# Altium PCB PowerDist.PcbDoc (part 1 of 2)
Units mm, origin at the board's own origin, x right, y up, seen from the top; angles counter-clockwise.
Board outline 126.62 x 74.17 mm, 2 copper layers (Top Layer, Bottom Layer); 124 components, 104 nets, 423 pads, 40 vias.
Unrouted connection lines stored in the file: 201.
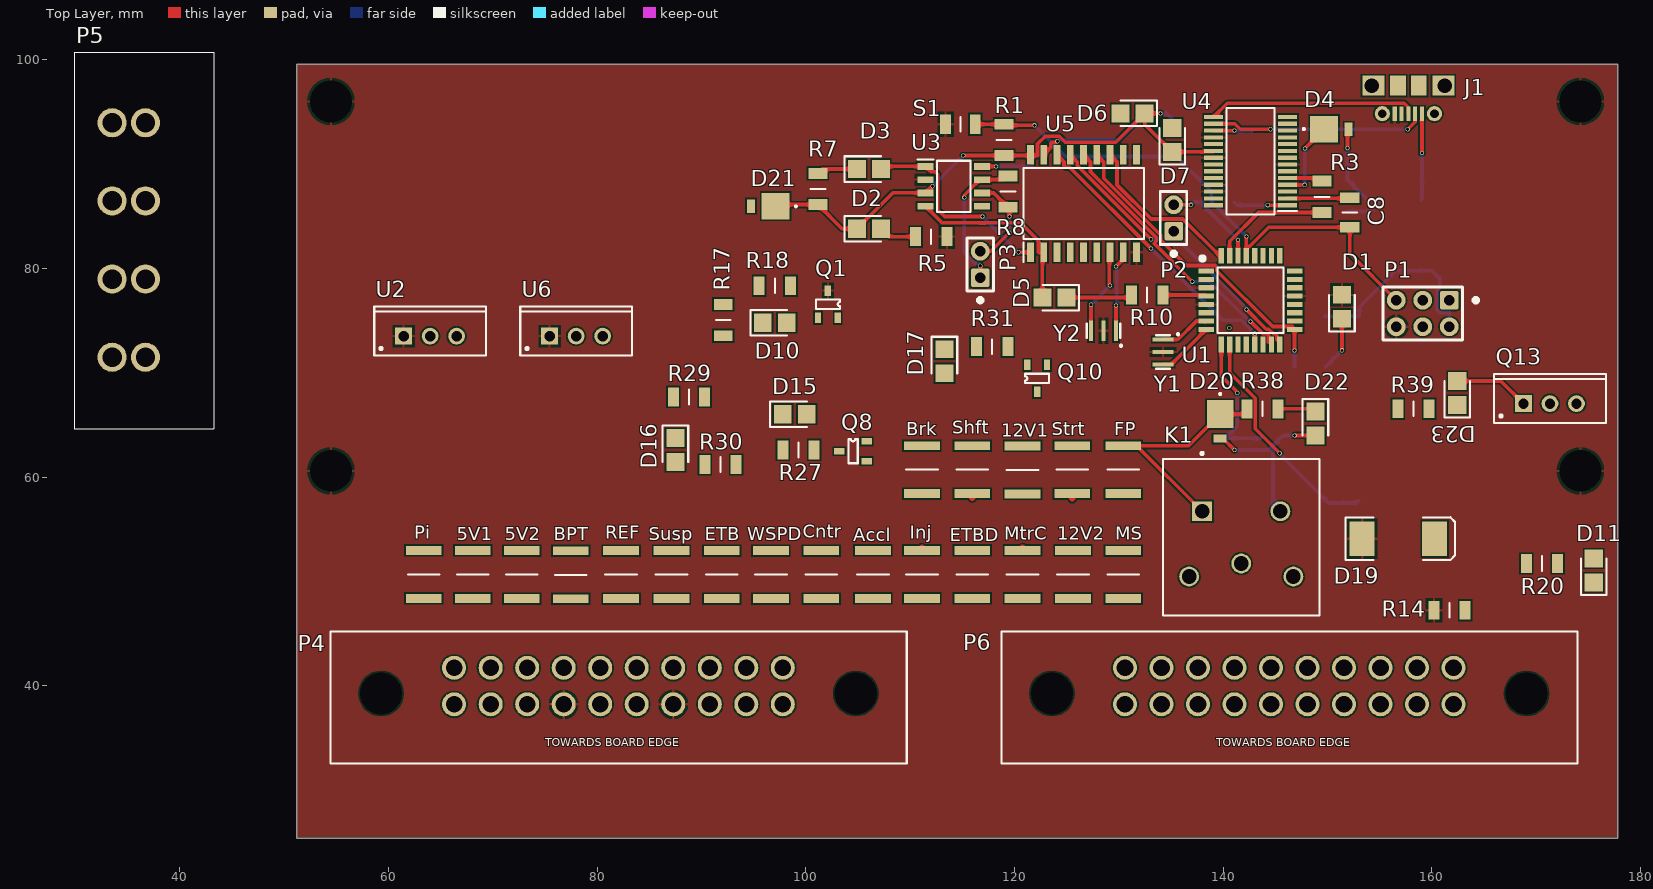
[diagram p0: Top Layer view]
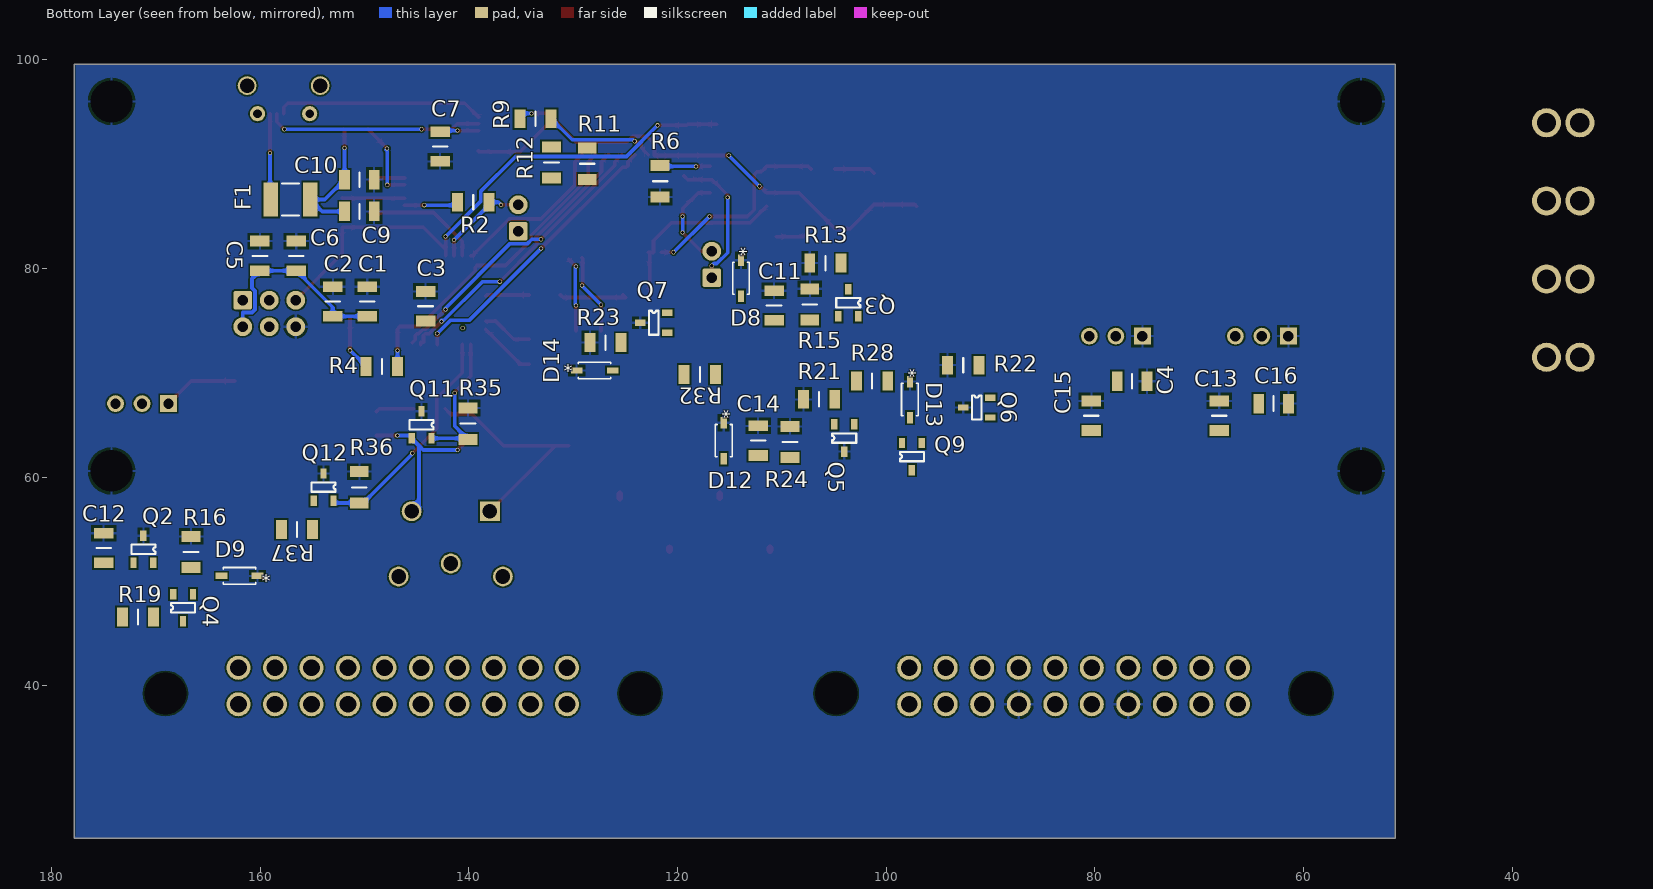
[diagram p1: Bottom Layer view, seen from below]

## Layer stack, top to bottom
Top Solder: solder mask 0.0102, Solder Resist, Dk 3.5
Top Layer: signal copper 0.0356
Dielectric 1: dielectric 0.32, FR-4, Dk 4.8
Bottom Layer: signal copper 0.0356
Bottom Solder: solder mask 0.0102, Solder Resist, Dk 3.5

## Board outline
51.181,99.568 51.181,25.4 177.8,25.4 177.8,99.568

## Design rules (kind name [scope] priority, off if disabled: settings)
Clearance [All] p1: gap=0.1 ignorepadtopadclearanceinfootprint=FALSE except(0.15: Arc-Poly Track-Poly SMDPad-Poly THPad-Poly Via-Poly Fill-Poly Poly-Poly)
PolygonConnect [All] p1: connectstyle=Relief reliefconductorwidth=0.254 reliefentries=4 polygonreliefangle="90 Angle" airgapwidth=0.254
RoutingVias [All] p1: holewidth=0.3 width=0.4 viastyle="Through Hole" minholewidth=0.3 minwidth=0.4 maxholewidth=0.3 maxwidth=0.4
SolderMaskExpansion [All] p1: expansion=0.102
Width [All] p1: maxlimit=6.5 minlimit=0.35 preferedwidth=0.35 minimp=50.000000 maximp=50.000000 favimp=50.000000
30 further rules are at their usual default settings.

## Classes and differential pairs
component class Candunio: C1 C2 C3 C5 C6 C7 C8 C9 C10 D1 D2 D3 D4 D5 D6 D7 D21 F1 J1 P1 P2 P3 R1 R2 R3 R4 R5 R6 R7 R8 R9 R10 R11 R12 S1 U1 U3 U4 U5 Y1 Y2
component class Fusing: 5VSpr1 5VSpr2 12VSpr1 12VSpr2 ACCL BPT BRKLTVIN C4 C13 C15 C16 Cntrllr ETB ETBDrv Fp Inj "MABX REF" MS "Mtr Cntrl" P4 P5 P6 Pi Shft Strt Susp U2 U6 WSPD
component class HighCurrentSwitches: D19 D20 D22 D23 K1 Q11 Q12 Q13 R35 R36 R37 R38 R39
component class LowCurrentSwitches: C11 C12 C14 D8 D9 D10 D11 D12 D13 D14 D15 D16 D17 Q1 Q2 Q3 Q4 Q5 Q6 Q7 Q8 Q9 Q10 R13 R14 R15 R16 R17 R18 R19 R20 R21 R22 R23 R24 R27 R28 R29 R30 R31 R32

## Components (designator, comment, footprint, x,y, rotation, side; value= is the part's Value field where it differs from the comment)
5V1 "1A" FUSC4632X85N 68.072,50.687 r270 top (schematic designator 5VSpr1)
5V2 "1A" FUSC4632X85N 72.771,50.659 r90 top (schematic designator 5VSpr2)
12V1 "1A" FUSC4632X85N 120.777,60.692 r270 top (schematic designator 12VSpr1)
12V2 "1A" FUSC4632X85N 125.603,50.687 r90 top (schematic designator 12VSpr2)
Accl "500mA" FUSC4632X85N 106.426,50.687 r270 top (schematic designator ACCL)
BPT "500mA" FUSC4632X85N 77.47,50.645 r270 top
Brk "1A" FUSC4632X85N 111.125,60.72 r270 top (schematic designator BRKLTVIN)
C1 "4.7uF" CAPC3216X170N 149.733,76.835 r90 bottom
C2 "1uF" CAPC3216X170N 153.035,76.835 r270 bottom
C3 "100nF" CAPC3216X170N 144.145,76.382 r270 bottom
C4 "Cap2" CAPC3216X170N 76.42,69.19 r180 bottom value=10uF
C5 "4.7uF" CAPC3216X170N 160.02,81.212 r270 bottom
C6 "100nF" CAPC3216X170N 156.545,81.212 r270 bottom
C7 "100nF" CAPC3216X170N 142.748,91.694 r90 bottom
C8 "100nF" CAPC3216X170N 152.146,85.368 r270 top
C9 "4.7uF" CAPC3216X170N 150.495,85.471 r0 bottom
C10 "1uF" CAPC3216X170N 150.495,88.519 r0 bottom
C11 "Cap2" CAPC3216X170N 110.744,76.454 r90 bottom value=10uF
C12 "Cap2" CAPC3216X170N 175.006,53.213 r90 bottom value=10uF
C13 "Cap2" CAPC3216X170N 68.072,65.89 r90 bottom value=10uF
C14 "Cap2" CAPC3216X170N 112.268,63.5 r90 bottom value=10uF
C15 "Cap2" CAPC3216X170N 80.331,65.89 r90 bottom value=10uF
C16 "Cap2" CAPC3216X170N 62.86,67.056 r180 bottom value=10uF
Cntr "1A" FUSC4632X85N 101.473,50.659 r270 top (schematic designator Cntrllr)
D1 "Red" LEDC3216X120NRED 151.384,76.327 r90 top
D2 "Green" LEDC3216X120NGRN 106.045,83.82 r0 top
D3 "Yellow" LEDC3216X120NYEL 106.052,89.535 r0 top
D4 "Diode" DO-220AA 150.368,93.345 r0 top
D5 "Yellow" LEDC3216X120NYEL 123.825,77.216 r180 top
D6 "Yellow" LEDC3216X120NYEL 131.318,94.869 r180 top
D7 "Yellow" LEDC3216X120NYEL 135.128,92.329 r90 top
D8 "Diode" SOD123 113.919,79.068 r270 bottom
D9 "Diode" SOD123 161.983,50.546 r0 bottom
D10 "Red" LEDC3216X120NRED 97.028,74.803 r0 top
D11 "Red" LEDC3216X120NRED 175.514,51.054 r90 top
D12 "Diode" SOD123 115.57,63.5 r270 bottom
D13 "Diode" SOD123 97.724,67.437 r270 bottom
D14 "Diode" SOD123 127.942,70.231 r180 bottom
D15 "Red" LEDC3216X120NRED 98.933,66.042 r0 top
D16 "Red" LEDC3216X120NRED 87.503,62.611 r270 top
D17 "Red" LEDC3216X120NRED 113.284,71.113 r270 top
D19 "Diode" SMC 156.799,54.102 r0 top
D20 "Diode" DO-220AA 139.7,65.341 r270 top
D21 "Diode" DO-220AA 96.395,85.979 r180 top
D22 "Red" LEDC3216X120NRED 148.844,65.151 r270 top
D23 "Red" LEDC3216X120NRED 162.433,68.072 r90 top
ETB "500mA" FUSC4632X85N 91.948,50.659 r270 top
ETBD "1A" FUSC4632X85N 115.951,50.687 r270 top (schematic designator ETBDrv)
F1 "Fuse 2" 1812 157.085,86.614 r0 bottom
FP "1A" FUSC4632X85N 130.429,60.72 r270 top (schematic designator "FP Rly")
Inj "1A" FUSC4632X85N 111.125,50.687 r270 top
J1 "USB micro B" 1050170001 157.75,97.536 r180 top
K1 "PB134012" TECO-PB134-5_V 141.732,54.229 r270 top
MS "1A" FUSC4632X85N 130.429,50.659 r270 top
MtrC "1A" FUSC4632X85N 120.777,50.687 r270 top (schematic designator "Mtr Cntrl")
P1 "ICSP" "Pin Header 2x3 TH Pitch 2.54mm" 161.671,74.422 r180 top
P2 "Serial" "Pin Header 1x2 TH Pitch 2.54mm" 135.255,83.566 r90 top
P3 "CANOUT" "Pin Header 1x2 TH Pitch 2.54mm" 116.713,79.121 r90 top
P4 "MX150-20" "MX150 20 PIN" 82.04,39.98 r0 top
P5 "43160-3102" 431603102 35.612,82.677 r90 top
P6 "MX150-20" "MX150 20 PIN" 146.332,39.98 r0 top
Pi "2A" FUSC4632X85N 63.373,50.687 r270 top
Q1 "MOSFET-N" SOT23-3#1 102.108,76.581 r180 top
Q2 "MOSFET-N" SOT23-3#2 171.196,53.086 r0 bottom
Q3 "MOSFET-P" SOT23-3#2 103.632,76.708 r0 bottom
Q4 "MOSFET-P" SOT23-3#2 167.386,47.498 r180 bottom
Q5 "MOSFET-N" SOT23-3#2 104.013,63.754 r180 bottom
Q6 "MOSFET-N" SOT23-3#2 91.313,66.675 r270 bottom
Q7 "MOSFET-N" SOT23-3#2 122.271,74.803 r270 bottom
Q8 "MOSFET-P" SOT23-3#1 104.521,62.484 r270 top
Q9 "MOSFET-P" SOT23-3#2 97.536,61.976 r180 bottom
Q10 "MOSFET-P" SOT23-3#1 122.174,69.469 r0 top
Q11 "MOSFET-N" SOT23-3#2 144.526,65.024 r0 bottom
Q12 "MOSFET-N" SOT23-3#2 153.924,59.055 r0 bottom
Q13 "MOSFET-P" TO-220AB 171.323,67.056 r0 top
R1 "10K" RESC3216X60N 118.999,92.329 r90 top
R2 "1K" RESC3216X60N 139.573,86.36 r0 bottom
R3 "1K" RESC3216X60N 149.479,86.868 r90 top
R4 "1K" RESC3216X60N 148.336,70.612 r180 bottom
R5 "1K" RESC3216X60N 112.014,83.058 r0 top
R6 "16.9K" RESC3216X60N 121.666,88.368 r90 bottom
R7 "1K" RESC3216X60N 101.158,87.63 r90 top
R8 "120" RESC3216X60N 119.38,87.372 r270 top
R9 "10K" RESC3216X60N 133.604,94.361 r0 bottom
R10 "1K" RESC3216X60N 132.715,77.47 r0 top
R11 "1K" RESC3216X60N 128.651,90.043 r90 bottom
R12 "1K" RESC3216X60N 132.08,90.17 r90 bottom
R13 "1206" RESC3216X60N 105.821,80.518 r180 bottom value=1M
R14 "1206" RESC3216X60N 161.695,47.244 r0 top value=1M
R15 "1K" RESC3216X60N 107.315,76.557 r270 bottom
R16 "1K" RESC3216X60N 166.624,52.832 r270 bottom
R17 "1206" RESC3216X60N 92.075,75.057 r270 top value=511
R18 "1206" RESC3216X60N 97.028,78.359 r180 top value=1M
R19 "1206" RESC3216X60N 171.704,46.609 r0 bottom value=511
R20 "1206" RESC3216X60N 170.561,51.729 r0 top value=1M
R21 "1206" RESC3216X60N 106.426,67.461 r180 bottom value=1M
R22 "1206" RESC3216X60N 92.607,70.739 r180 bottom value=1M
R23 "1206" RESC3216X60N 126.897,72.898 r180 bottom value=1M
R24 "1K" RESC3216X60N 109.22,63.373 r270 bottom
R27 "1206" RESC3216X60N 99.29,62.611 r180 top value=511
R28 "1206" RESC3216X60N 101.346,69.215 r180 bottom value=1M
R29 "1206" RESC3216X60N 88.797,67.691 r180 top value=511
R30 "1206" RESC3216X60N 91.821,61.214 r0 top value=1M
R31 "1206" RESC3216X60N 117.856,72.517 r180 top value=511
R32 "1206" RESC3216X60N 117.856,69.85 r0 bottom value=1M
R35 "1206" RESC3216X60N 140.081,65.127 r270 bottom value=1M
R36 "1206" RESC3216X60N 150.495,59.031 r270 bottom value=1M
R37 "1206" RESC3216X60N 156.464,54.991 r0 bottom value=1M
R38 "1206" RESC3216X60N 143.764,66.548 r0 top value=511
R39 "1206" RESC3216X60N 158.242,66.562 r0 top value=511
REF "500mA" FUSC4632X85N 82.296,50.659 r270 top (schematic designator "MABX REF")
S1 "SW-PB" SMDswitch_1206 114.808,93.829 r180 top
Shft "1A" FUSC4632X85N 115.951,60.72 r90 top
Strt "1A" FUSC4632X85N 125.537,60.72 r90 top
Susp "500mA" FUSC4632X85N 87.122,50.659 r270 top
U1 "ATmega328P-AU" QFP80P900X900X120-32N 142.621,76.962 r0 top
U2 "LM1085IT-5.0/NOPB" T03B 63.98,73.524 r0 top
U3 "MCP2551-E/SN" SOIC127P600X175-8N 114.173,87.884 r0 top
U4 "FT232RL-Reel" SOP65P780X200-28N 142.621,90.297 r180 top
U5 "MCP2515-E/ST" SOIC127P1030X265-18N 126.619,86.233 r90 top
U6 "LM1085IT-5.0/NOPB" T03B 77.978,73.524 r0 top
WSPD "500mA" FUSC4632X85N 96.647,50.659 r270 top
Y1 "CSTCE16M0V53-R0" CSTCE_G 134.239,72.009 r90 top
Y2 "CSTCE16M0V53-R0" CSTCE_G 128.524,74.041 r0 top

## Footprints (in the part's own frame and the unit in brackets; to place one, negate y for a bottom-side part, rotate by r counter-clockwise, add the part's x,y. Pads: shape width x height; smd on the part's side, far side on the other; paste and mask are expansions set on the pad)
1812 [mm] "Chip Capacitor, Body 4.5x3.2mm, IPC High Density"
  rect 1.4x3.3 smd: 1(-1.9,0) 2(1.9,0)
  silkscreen extent -0.8,-1.55 0.8,1.55, body extent -2.4,-1.7 2.4,1.7, height 1.4
431603102 [mm]
  round 2.79 hole 1.86: 1(11.292,-1.091) 1(11.292,2.1) 2(3.81,-1.091) 2(3.81,2.1) 3(-3.69,-1.091) 3(-3.69,2.1) 4(-11.18,-1.091) 4(-11.18,2.1)
  silkscreen extent -18.03,-7.62 18.03,5.72, body extent -18,-7.66 18.06,5.73, height 15.38
1050170001 [mm]
  round 1.8 hole 1.4: 0(-3.5,0) 0(3.5,0)
  rect 2.1x1.9 smd: 0(-3.35,0) 0(3.35,0)
  round 1.45 hole 0.85: 0(-2.5,2.7) 0(2.5,2.7)
  rect 1.5x1.9 smd: 0(-1,0) 0(1,0)
  rect 0.4x1.35 smd: 1(-1.3,2.7) 2(-0.65,2.7) 3(0,2.7) 4(0.65,2.7) 5(1.3,2.7)
  body extent -4.1,-2.5 4.1,2.9, height 2.78
CAPC3216X170N [mm]
  rect 1.03x1.87 smd: 1(-1.42,0) 2(1.42,0)
  silkscreen extent 0,-0.7 0,0.7, body extent -2.11,-1.11 2.11,1.11, height 1.27
CSTCE_G [mm]
  rect 0.4x2 smd: 1(1.2,0) 2(0,0) 3(-1.2,0)
  silkscreen extent -1.6,-1.52 1.77,0.65, body extent -1.6,-0.65 1.6,0.65, height 0.7
DO-220AA [mil]
  rect 30x50 smd: 1(65.06,0)
  rect 105.12x100 smd: 2(-27.5,0)
  silkscreen extent -107,-2 -102,3, body extent -76,-40 76,40, height 39
FUSC4632X85N [mm]
  rect 0.85x3.43 smd: 1(-2.3,0) 2(2.3,0)
  silkscreen extent 0,-1.52 0,1.52, body extent -2.27,-1.62 2.28,1.62, height 0.85
LEDC3216X120NGRN [mm]
  rect 1.7x1.75 smd: 1(-1.15,0) 2(1.15,0)
  silkscreen extent -2.35,-1.22 1.15,1.22, body extent -1.6,-0.8 1.6,0.8, height 1.1
LEDC3216X120NRED [mm]
  rect 1.7x1.75 smd: 1(-1.15,0) 2(1.15,0)
  silkscreen extent -2.35,-1.22 1.15,1.22, body extent -1.6,-0.8 1.6,0.8, height 1.1
LEDC3216X120NYEL [mm]
  rect 1.7x1.75 smd: 1(-1.15,0) 2(1.15,0)
  silkscreen extent -2.35,-1.22 1.15,1.22, body extent -1.6,-0.8 1.6,0.8, height 1.1
"MX150 20 PIN" [mm]
  round 2.3 hole 1.6: 1(-15.75,1.75) 2(-12.25,1.75) 3(-8.75,1.75) 4(-5.25,1.75) 5(-1.75,1.75) 6(1.75,1.75) 7(5.25,1.75) 8(8.75,1.75) 9(12.25,1.75) 10(15.75,1.75) 11(-15.75,-1.75) 12(-12.25,-1.75) 13(-8.75,-1.75) 14(-5.25,-1.75) 15(-1.75,-1.75) 16(1.75,-1.75) 17(5.25,-1.75) 18(8.75,-1.75) 19(12.25,-1.75) 20(15.75,-1.75)
  round 1.9 hole 4.05 unplated: 21(22.75,-0.71) 22(-22.75,-0.71)
  silkscreen extent -27.59,-7.43 27.63,5.24, body extent -31.77,-39.98 31.92,2.58, height 23.64
"Pin Header 1x2 TH Pitch 2.54mm" [mm]
  rrect25% 1.8x1.8 hole 1: 1(0,0)
  round 1.8 hole 1: 2(2.54,0)
  silkscreen extent -2.3,-1.27 3.81,1.27, body extent -2.55,-1.4 3.94,1.4, height 9.5
"Pin Header 2x3 TH Pitch 2.54mm" [mm]
  rrect25% 1.8x1.8 hole 1: 1(0,-2.54)
  round 1.8 hole 1: 2(2.54,-2.54) 3(5.08,-2.54) 4(0,0) 5(2.54,0) 6(5.08,0)
  silkscreen extent -2.69,-3.81 6.35,1.27, body extent -1.27,-3.81 6.35,1.27, height 9.5
QFP80P900X900X120-32N [mm]
  rect 1.5x0.5 smd: 1(-4.25,2.8) 2(-4.25,2) 3(-4.25,1.2) 4(-4.25,0.4) 5(-4.25,-0.4) 6(-4.25,-1.2) 7(-4.25,-2) 8(-4.25,-2.8) 17(4.25,-2.8) 18(4.25,-2) 19(4.25,-1.2) 20(4.25,-0.4) 21(4.25,0.4) 22(4.25,1.2) 23(4.25,2) 24(4.25,2.8)
  rect 0.5x1.5 smd: 9(-2.8,-4.25) 10(-2,-4.25) 11(-1.2,-4.25) 12(-0.4,-4.25) 13(0.4,-4.25) 14(1.2,-4.25) 15(2,-4.25) 16(2.8,-4.25) 25(2.8,4.25) 26(2,4.25) 27(1.2,4.25) 28(0.4,4.25) 29(-0.4,4.25) 30(-1.2,4.25) 31(-2,4.25) 32(-2.8,4.25)
  silkscreen extent -4.8,-3.15 3.15,4.2, body extent -4.5,-4.5 4.5,4.5, height 1.2
RESC3216X60N [mm]
  rect 1.05x1.8 smd: 1(-1.5,0) 2(1.5,0)
  silkscreen extent 0,-0.7 0,0.7, body extent -1.57,-0.83 1.58,0.77, height 1.2
SMC [mm] "DO-214-AB/SMC; 2 C-Bend Leads; Body 7.9 x 5.9 mm, inc. leads (LxW)"
  rect 2.4x3.3 smd: 1(-3.475,0) 2(3.475,0)
  silkscreen extent -5.07,-2.05 5.43,2.05
SMDswitch_1206 [mm]
  rect 1.03x1.87 smd: 1(-1.42,0) 2(1.42,0)
  silkscreen extent 0,-0.7 0,0.7, body extent -1.53,-0.81 1.53,0.81, height 0.46
SOD123 [mm]
  rect 1.111x0.601 smd paste+0 mask+0: 1(-1.725,0) 2(1.725,0)
  silkscreen extent -1.55,-0.8 1.55,0.8, body extent -1.92,-0.67 1.92,0.67, height 0.81
SOIC127P600X175-8N [mm]
  rect 1.525x0.65 smd: 1(-2.712,1.905) 2(-2.712,0.635) 3(-2.712,-0.635) 4(-2.712,-1.905) 5(2.712,-1.905) 6(2.712,-0.635) 7(2.712,0.635) 8(2.712,1.905)
  silkscreen extent -3.47,-2.45 1.6,2.58, body extent -3,-2.45 3,2.45, height 1.75
SOIC127P1030X265-18N [mm]
  rect 1.85x0.65 smd: 1(-4.675,5.08) 2(-4.675,3.81) 3(-4.675,2.54) 4(-4.675,1.27) 5(-4.675,0) 6(-4.675,-1.27) 7(-4.675,-2.54) 8(-4.675,-3.81) 9(-4.675,-5.08) 10(4.675,-5.08) 11(4.675,-3.81) 12(4.675,-2.54) 13(4.675,-1.27) 14(4.675,0) 15(4.675,1.27) 16(4.675,2.54) 17(4.675,3.81) 18(4.675,5.08)
  silkscreen extent -5.6,-5.77 3.4,5.77, body extent -5.15,-5.77 5.15,5.78, height 2.65
SOP65P780X200-28N [mm]
  rect 1.8x0.4 smd: 1(-3.55,4.225) 2(-3.55,3.575) 3(-3.55,2.925) 4(-3.55,2.275) 5(-3.55,1.625) 6(-3.55,0.975) 7(-3.55,0.325) 8(-3.55,-0.325) 9(-3.55,-0.975) 10(-3.55,-1.625) 11(-3.55,-2.275) 12(-3.55,-2.925) 13(-3.55,-3.575) 14(-3.55,-4.225) 15(3.55,-4.225) 16(3.55,-3.575) 17(3.55,-2.925) 18(3.55,-2.275) 19(3.55,-1.625) 20(3.55,-0.975) 21(3.55,-0.325) 22(3.55,0.325) 23(3.55,0.975) 24(3.55,1.625) 25(3.55,2.275) 26(3.55,2.925) 27(3.55,3.575) 28(3.55,4.225)
  silkscreen extent -4.45,-5.1 2.3,5.1, body extent -3.9,-5.1 3.9,5.1, height 2
SOT23-3#1 [mm] "SOT23-3"
  round 0.2 on Top Overlay: 1(-1.5,-0.55)
  rect 0.6x1 smd: 1(0.95,1.3) 2(-0.95,1.3) 3(0,-1.3)
  silkscreen extent -1.15,-0.45 1.15,0.45, body extent -1.45,-1.4 1.45,1.4, height 1.3
SOT23-3#2 [mm] "SOT23-3"
  round 0.2 on Bottom Overlay: 1(-1.5,-0.55)
  rect 0.6x1 smd: 1(0.95,1.3) 2(-0.95,1.3) 3(0,-1.3)
  silkscreen extent -1.15,-0.45 1.15,0.45, body extent -1.45,-1.4 1.45,1.4, height 1.3
T03B [mm] "TO, Thru-Hole, Vertical, Heatsink Mounted; 3 In-Line Leads; Pitch 2.54 mm"
  rect 1.6x1.6 hole 1: 1(-2.54,0)
  round 1.6 hole 1: 2(0,0) 3(2.54,0)
  silkscreen extent -5.35,-1.85 5.35,2.85, body extent -5.4,-1.9 5.4,2.9, height 19.4
TECO-PB134-5_V [mm] "THD, 5-Leads, Body 15x15mm, Height 20mm"
  rect 1.9x1.9 hole 1.4: 1(-2.5,-3.75)
  round 1.9 hole 1.4: 2(-2.5,3.75) 3(3.75,5) 4(2.5,0) 5(3.75,-5)
  silkscreen extent -8.17,-7.5 7.5,7.5, body extent -7.5,-7.5 7.5,7.5, height 20
TO-220AB [mm] "TO, Thru-Hole, Vertical, Heatsink Mounted; 3 In-Line Leads; Pitch 2.54 mm"
  rect 1.6x1.6 hole 1: 1(-2.54,0)
  round 1.6 hole 1: 2(0,0) 3(2.54,0)
  silkscreen extent -5.35,-1.85 5.35,2.85, body extent -5.4,-1.9 5.4,2.9, height 19.3

## Part data
5V1 5V2 12V1 12V2 Cntr: library part "Fuse 2", "Fuse", Supplier Part Number=507-1878-1-ND, LatestRevisionDate=17-Jul-2002, LatestRevisionNote="Re-released for DXP Platform.", PackageDescription="Thru-Hole; 2 Leads", PackageReference=PIN-W2/E2.8, Published=8-Jun-2000, Publisher="Altium Limited"
Accl BPT ETB REF Susp WSPD: library part "Fuse 2", "Fuse", Case/Package=1812, Case Code (Metric)=4532, Current Rating=100A, Manufacturer=Bourns, Manufacturer Part Number=MF-MSMF050-2, Max Operating Temperature=85°C, Min Operating Temperature=-40°C, Operating Supply Voltage=15V, Package Quantity=2000, Power Dissipation=800mW, Resistance=150mR, Supplier Part Number=507-1876-1-ND, Trip Current=1A, Approvals=UL,CSA,TUV, Case Code (Imperial)=1812, ComponentLink1Description=https://datasheet.ciiva.com/326/mfmsmf-326354.pdf, ComponentLink1URL=https://datasheet.ciiva.com/326/mfmsmf-326354.pdf, ComponentLink2Description=https://datasheet.ciiva.com/1228/1786007-1228155.pdf, ComponentLink2URL=https://datasheet.ciiva.com/1228/1786007-1228155.pdf, ComponentLink3Description=https://datasheet.ciiva.com/16205/mfmsmf-16205994.pdf, ComponentLink3URL=https://datasheet.ciiva.com/16205/mfmsmf-16205994.pdf, ComponentLink4Description=https://datasheet.ciiva.com/34302/1164200-34302041.pdf, ComponentLink4URL=https://datasheet.ciiva.com/34302/1164200-34302041.pdf, ComponentLink5Description=https://datasheet.ciiva.com/14537/70153434-14537737.pdf, ComponentLink5URL=https://datasheet.ciiva.com/14537/70153434-14537737.pdf, ComponentLink6Description=https://datasheet.ciiva.com/46395/1695373-46395287.pdf, ComponentLink6URL=https://datasheet.ciiva.com/46395/1695373-46395287.pdf, ComponentLink7Description=https://datasheet.ciiva.com/22749/1695373-22749079.pdf, ComponentLink7URL=https://datasheet.ciiva.com/22749/1695373-22749079.pdf, ComponentLink8Description=https://datasheet.ciiva.com/32426/mf-msmf-series-eng-tds-32426126.pdf, ComponentLink8URL=https://datasheet.ciiva.com/32426/mf-msmf-series-eng-tds-32426126.pdf, ComponentLink9Description=https://datasheet.ciiva.com/4501/mfmsmf-72300-4501655.pdf, ComponentLink9URL=https://datasheet.ciiva.com/4501/mfmsmf-72300-4501655.pdf, ComponentLink10Description=https://datasheet.ciiva.com/3019/mfmsmf-3019622.pdf, ComponentLink10URL=https://datasheet.ciiva.com/3019/mfmsmf-3019622.pdf, ComponentLink11Description=https://datasheet.ciiva.com/3019/mfmsmf-3019621.pdf, ComponentLink11URL=https://datasheet.ciiva.com/3019/mfmsmf-3019621.pdf, ComponentLink12Description=https://datasheet.ciiva.com/326/mfmsmf-326356.pdf, ComponentLink12URL=https://datasheet.ciiva.com/326/mfmsmf-326356.pdf, ComponentLink13Description=https://datasheet.ciiva.com/1274/1786007-1274499.pdf, ComponentLink13URL=https://datasheet.ciiva.com/1274/1786007-1274499.pdf, ComponentLink14Description=https://datasheet.ciiva.com/326/mfmsmf-326355.pdf, ComponentLink14URL=https://datasheet.ciiva.com/326/mfmsmf-326355.pdf, ComponentLink15Description=https://datasheet.ciiva.com/1274/1786007-1274498.pdf, ComponentLink15URL=https://datasheet.ciiva.com/1274/1786007-1274498.pdf, ComponentLink16Description=https://datasheet.ciiva.com/15226/getdatasheetpartid-117168-15226886.pdf, ComponentLink16URL=https://datasheet.ciiva.com/15226/getdatasheetpartid-117168-15226886.pdf, ComponentLink17Description=https://datasheet.ciiva.com/25894/mfmsmf-25894175.pdf, ComponentLink17URL=https://datasheet.ciiva.com/25894/mfmsmf-25894175.pdf, Contact Plating=Gold, Height=0.85mm, Hold Current=500mA, LatestRevisionDate=17-Jul-2002, LatestRevisionNote="Re-released for DXP Platform.", Lead Free="Lead Free", Length=4.73mm, Max Current Rating=100A, Mount="Surface Mount,PCB", Number of Terminals=2, PackageDescription="Thru-Hole; 2 Leads", PackageReference=PIN-W2/E2.8, Packaging="Tape and Reel", part number=MF-MSMF050-2, Pricing 1="2000=0.2898, 4000=0.28463, 6000=0.27945, 10000=0.2691 (USD)", Published=8-Jun-2000, Publisher="Altium Limited", Radiation Hardening=No, REACH SVHC="No SVHC", Stock 1=126000, Supplier 1=Digi-Key, Terminal Material=Gold, Termination=SMD/SMT, Time to Trip=0.15s, Voltage Rating=15V, Voltage Rating (DC)=15V, Width=3.41mm
Brk ETBD FP Inj MS MtrC Shft Strt: library part "Fuse 2", "Fuse", Case/Package=1812, Case Code (Metric)=4532, Current Rating=100A, Hold Current=500mA, Manufacturer=Bourns, Manufacturer Part Number=MF-MSMF050-2, Max Operating Temperature=85°C, Min Operating Temperature=-40°C, Operating Supply Voltage=15V, Package Quantity=2000, Power Dissipation=800mW, Resistance=150mR, Supplier Part Number=507-1878-1-ND, Approvals=UL,CSA,TUV, Case Code (Imperial)=1812, ComponentLink1Description=https://datasheet.ciiva.com/326/mfmsmf-326354.pdf, ComponentLink1URL=https://datasheet.ciiva.com/326/mfmsmf-326354.pdf, ComponentLink2Description=https://datasheet.ciiva.com/1228/1786007-1228155.pdf, ComponentLink2URL=https://datasheet.ciiva.com/1228/1786007-1228155.pdf, ComponentLink3Description=https://datasheet.ciiva.com/16205/mfmsmf-16205994.pdf, ComponentLink3URL=https://datasheet.ciiva.com/16205/mfmsmf-16205994.pdf, ComponentLink4Description=https://datasheet.ciiva.com/34302/1164200-34302041.pdf, ComponentLink4URL=https://datasheet.ciiva.com/34302/1164200-34302041.pdf, ComponentLink5Description=https://datasheet.ciiva.com/14537/70153434-14537737.pdf, ComponentLink5URL=https://datasheet.ciiva.com/14537/70153434-14537737.pdf, ComponentLink6Description=https://datasheet.ciiva.com/46395/1695373-46395287.pdf, ComponentLink6URL=https://datasheet.ciiva.com/46395/1695373-46395287.pdf, ComponentLink7Description=https://datasheet.ciiva.com/22749/1695373-22749079.pdf, ComponentLink7URL=https://datasheet.ciiva.com/22749/1695373-22749079.pdf, ComponentLink8Description=https://datasheet.ciiva.com/32426/mf-msmf-series-eng-tds-32426126.pdf, ComponentLink8URL=https://datasheet.ciiva.com/32426/mf-msmf-series-eng-tds-32426126.pdf, ComponentLink9Description=https://datasheet.ciiva.com/4501/mfmsmf-72300-4501655.pdf, ComponentLink9URL=https://datasheet.ciiva.com/4501/mfmsmf-72300-4501655.pdf, ComponentLink10Description=https://datasheet.ciiva.com/3019/mfmsmf-3019622.pdf, ComponentLink10URL=https://datasheet.ciiva.com/3019/mfmsmf-3019622.pdf, ComponentLink11Description=https://datasheet.ciiva.com/3019/mfmsmf-3019621.pdf, ComponentLink11URL=https://datasheet.ciiva.com/3019/mfmsmf-3019621.pdf, ComponentLink12Description=https://datasheet.ciiva.com/326/mfmsmf-326356.pdf, ComponentLink12URL=https://datasheet.ciiva.com/326/mfmsmf-326356.pdf, ComponentLink13Description=https://datasheet.ciiva.com/1274/1786007-1274499.pdf, ComponentLink13URL=https://datasheet.ciiva.com/1274/1786007-1274499.pdf, ComponentLink14Description=https://datasheet.ciiva.com/326/mfmsmf-326355.pdf, ComponentLink14URL=https://datasheet.ciiva.com/326/mfmsmf-326355.pdf, ComponentLink15Description=https://datasheet.ciiva.com/1274/1786007-1274498.pdf, ComponentLink15URL=https://datasheet.ciiva.com/1274/1786007-1274498.pdf, ComponentLink16Description=https://datasheet.ciiva.com/15226/getdatasheetpartid-117168-15226886.pdf, ComponentLink16URL=https://datasheet.ciiva.com/15226/getdatasheetpartid-117168-15226886.pdf, ComponentLink17Description=https://datasheet.ciiva.com/25894/mfmsmf-25894175.pdf, ComponentLink17URL=https://datasheet.ciiva.com/25894/mfmsmf-25894175.pdf, Contact Plating=Gold, Height=0.85mm, LatestRevisionDate=17-Jul-2002, LatestRevisionNote="Re-released for DXP Platform.", Lead Free="Lead Free", Length=4.73mm, Max Current Rating=100A, Mount="Surface Mount,PCB", Number of Terminals=2, PackageDescription="Thru-Hole; 2 Leads", PackageReference=PIN-W2/E2.8, Packaging="Tape and Reel", part number=MF-MSMF050-2, Pricing 1="2000=0.2898, 4000=0.28463, 6000=0.27945, 10000=0.2691 (USD)", Published=8-Jun-2000, Publisher="Altium Limited", Radiation Hardening=No, REACH SVHC="No SVHC", Stock 1=126000, Supplier 1=Digi-Key, Terminal Material=Gold, Termination=SMD/SMT, Time to Trip=0.15s, Trip Current=1A, Voltage Rating=15V, Voltage Rating (DC)=15V, Width=3.41mm
C1 C5 C9: library part "Cap Semi", "Capacitor (Semiconductor SIM Model)", Capacitance=1uF, Case/Package=1206, Case Code (Metric)=3216, Dielectric=X7R, Manufacturer=Murata, Manufacturer Part Number=GRM31MR71H105KA88L, Max Operating Temperature=125°C, Min Operating Temperature=-55°C, Package Quantity=1, Supplier Part Number=1276-1055-1-ND, Tolerance=10%, Voltage=50V, Case Code (Imperial)=1206, ComponentLink1Description=https://datasheet.ciiva.com/16379/product-16379616.pdf, ComponentLink1URL=https://datasheet.ciiva.com/16379/product-16379616.pdf, ComponentLink2Description=https://datasheet.ciiva.com/14116/nmgrm-data-en-14116709.pdf, ComponentLink2URL=https://datasheet.ciiva.com/14116/nmgrm-data-en-14116709.pdf, ComponentLink3Description=https://datasheet.ciiva.com/22703/608985-22703384.pdf, ComponentLink3URL=https://datasheet.ciiva.com/22703/608985-22703384.pdf, ComponentLink4Description=https://datasheet.ciiva.com/3777/42grm31mr71h105ka8823-3777081.pdf, ComponentLink4URL=https://datasheet.ciiva.com/3777/42grm31mr71h105ka8823-3777081.pdf, ComponentLink5Description=https://datasheet.ciiva.com/6270/partnumbering-e-01-6270398.pdf, ComponentLink5URL=https://datasheet.ciiva.com/6270/partnumbering-e-01-6270398.pdf, ComponentLink6Description=https://datasheet.ciiva.com/6270/partnumbering-e-01-6270399.pdf, ComponentLink6URL=https://datasheet.ciiva.com/6270/partnumbering-e-01-6270399.pdf, ComponentLink7Description=https://datasheet.ciiva.com/29199/455056-da-01-en-vs-kondensator-1206-29199449.pdf, ComponentLink7URL=https://datasheet.ciiva.com/29199/455056-da-01-en-vs-kondensator-1206-29199449.pdf, ComponentLink8Description=https://datasheet.ciiva.com/29202/450923-da-01-de-vs-chip-kond-1206-1-0-uf-10pr-50-0v-x7r-29202718.pdf, ComponentLink8URL=https://datasheet.ciiva.com/29202/450923-da-01-de-vs-chip-kond-1206-1-0-uf-10pr-50-0v-x7r-29202718.pdf, Depth=1.6mm, Height=1.15mm, LatestRevisionDate=29-May-2009, LatestRevisionNote="IPC-7351 Footprint Added.", Lead Free="Lead Free", Length=3.2mm, Material=Ceramic, Mount="Surface Mount", Number of Pins=2, PackageDescription="Chip Capacitor", PackageReference=C1206, Packaging="Tape and Reel", Published=8-Jun-2000, Publisher="Altium Limited", REACH SVHC="No SVHC", Stock 1=0, Supplier 1=Digi-Key, Supplier 2=Digi-Key, Termination=SMD/SMT, Thickness=0.049inch, Voltage Rating=50V, Voltage Rating (DC)=50V, Width=0.063inch
C2 C10: library part "Cap Semi", "Capacitor (Semiconductor SIM Model)", Case/Package=1206, Case Code (Metric)=3216, Dielectric=X7R, Manufacturer=Murata, Manufacturer Part Number=GRM31MR71H105KA88L, Max Operating Temperature=125°C, Min Operating Temperature=-55°C, Package Quantity=1, Supplier Part Number=1276-3086-1-ND, Tolerance=10%, Voltage=50V, Capacitance=1uF, Case Code (Imperial)=1206, ComponentLink1Description=https://datasheet.ciiva.com/16379/product-16379616.pdf, ComponentLink1URL=https://datasheet.ciiva.com/16379/product-16379616.pdf, ComponentLink2Description=https://datasheet.ciiva.com/14116/nmgrm-data-en-14116709.pdf, ComponentLink2URL=https://datasheet.ciiva.com/14116/nmgrm-data-en-14116709.pdf, ComponentLink3Description=https://datasheet.ciiva.com/22703/608985-22703384.pdf, ComponentLink3URL=https://datasheet.ciiva.com/22703/608985-22703384.pdf, ComponentLink4Description=https://datasheet.ciiva.com/3777/42grm31mr71h105ka8823-3777081.pdf, ComponentLink4URL=https://datasheet.ciiva.com/3777/42grm31mr71h105ka8823-3777081.pdf, ComponentLink5Description=https://datasheet.ciiva.com/6270/partnumbering-e-01-6270398.pdf, ComponentLink5URL=https://datasheet.ciiva.com/6270/partnumbering-e-01-6270398.pdf, ComponentLink6Description=https://datasheet.ciiva.com/6270/partnumbering-e-01-6270399.pdf, ComponentLink6URL=https://datasheet.ciiva.com/6270/partnumbering-e-01-6270399.pdf, ComponentLink7Description=https://datasheet.ciiva.com/29199/455056-da-01-en-vs-kondensator-1206-29199449.pdf, ComponentLink7URL=https://datasheet.ciiva.com/29199/455056-da-01-en-vs-kondensator-1206-29199449.pdf, ComponentLink8Description=https://datasheet.ciiva.com/29202/450923-da-01-de-vs-chip-kond-1206-1-0-uf-10pr-50-0v-x7r-29202718.pdf, ComponentLink8URL=https://datasheet.ciiva.com/29202/450923-da-01-de-vs-chip-kond-1206-1-0-uf-10pr-50-0v-x7r-29202718.pdf, Depth=1.6mm, Height=1.15mm, LatestRevisionDate=29-May-2009, LatestRevisionNote="IPC-7351 Footprint Added.", Lead Free="Lead Free", Length=3.2mm, Material=Ceramic, Mount="Surface Mount", Number of Pins=2, PackageDescription="Chip Capacitor", PackageReference=C1206, Packaging="Tape and Reel", Published=8-Jun-2000, Publisher="Altium Limited", REACH SVHC="No SVHC", Stock 1=0, Supplier 1=Digi-Key, Supplier 2=Digi-Key, Termination=SMD/SMT, Thickness=0.049inch, Voltage Rating=50V, Voltage Rating (DC)=50V, Width=0.063inch
C3 C6 C7 C8: library part "Cap Semi", "Capacitor (Semiconductor SIM Model)", Capacitance=1uF, Case/Package=1206, Case Code (Metric)=3216, Dielectric=X7R, Manufacturer=Murata, Manufacturer Part Number=GRM31MR71H105KA88L, Max Operating Temperature=125°C, Min Operating Temperature=-55°C, Package Quantity=1, Supplier Part Number=1276-1151-1-ND, Tolerance=10%, Voltage=50V, Case Code (Imperial)=1206, ComponentLink1Description=https://datasheet.ciiva.com/16379/product-16379616.pdf, ComponentLink1URL=https://datasheet.ciiva.com/16379/product-16379616.pdf, ComponentLink2Description=https://datasheet.ciiva.com/14116/nmgrm-data-en-14116709.pdf, ComponentLink2URL=https://datasheet.ciiva.com/14116/nmgrm-data-en-14116709.pdf, ComponentLink3Description=https://datasheet.ciiva.com/22703/608985-22703384.pdf, ComponentLink3URL=https://datasheet.ciiva.com/22703/608985-22703384.pdf, ComponentLink4Description=https://datasheet.ciiva.com/3777/42grm31mr71h105ka8823-3777081.pdf, ComponentLink4URL=https://datasheet.ciiva.com/3777/42grm31mr71h105ka8823-3777081.pdf, ComponentLink5Description=https://datasheet.ciiva.com/6270/partnumbering-e-01-6270398.pdf, ComponentLink5URL=https://datasheet.ciiva.com/6270/partnumbering-e-01-6270398.pdf, ComponentLink6Description=https://datasheet.ciiva.com/6270/partnumbering-e-01-6270399.pdf, ComponentLink6URL=https://datasheet.ciiva.com/6270/partnumbering-e-01-6270399.pdf, ComponentLink7Description=https://datasheet.ciiva.com/29199/455056-da-01-en-vs-kondensator-1206-29199449.pdf, ComponentLink7URL=https://datasheet.ciiva.com/29199/455056-da-01-en-vs-kondensator-1206-29199449.pdf, ComponentLink8Description=https://datasheet.ciiva.com/29202/450923-da-01-de-vs-chip-kond-1206-1-0-uf-10pr-50-0v-x7r-29202718.pdf, ComponentLink8URL=https://datasheet.ciiva.com/29202/450923-da-01-de-vs-chip-kond-1206-1-0-uf-10pr-50-0v-x7r-29202718.pdf, Depth=1.6mm, Height=1.15mm, LatestRevisionDate=29-May-2009, LatestRevisionNote="IPC-7351 Footprint Added.", Lead Free="Lead Free", Length=3.2mm, Material=Ceramic, Mount="Surface Mount", Number of Pins=2, PackageDescription="Chip Capacitor", PackageReference=C1206, Packaging="Tape and Reel", Published=8-Jun-2000, Publisher="Altium Limited", REACH SVHC="No SVHC", Stock 1=0, Supplier 1=Digi-Key, Supplier 2=Digi-Key, Termination=SMD/SMT, Thickness=0.049inch, Voltage Rating=50V, Voltage Rating (DC)=50V, Width=0.063inch
C4 C11 C12 C13 C14 C15 C16: "Capacitor. Ceramic 10uF 50V rating recommended, place close to pin", Supplier Part Number 1=478-8496-1-ND, PackageDescription="Capacitor; 2 Leads", PackageReference=CAPR5-4X5, Published=23-Sep-2002, Publisher="Altium Limited", Supplier 1=Digi-Key
D1: library part LED2, "Typical RED, GREEN, YELLOW, AMBER GaAs LED", Case/Package=1206, Case Code (Metric)=3216, Colour=Yellow, Forward Current=20mA, Forward Voltage=2.1V, Lens Colour=White,Clear, Manufacturer="Broadcom Avago", Manufacturer Part Number=HSMY-C150, Max Operating Temperature=85°C, Max Power Dissipation=65mW, Min Operating Temperature=-40°C, Package Quantity=1, Reverse Voltage=5V, Supplier Part Number=732-4992-1-ND, Case Code (Imperial)=1206, ComponentLink1Description=https://datasheet.ciiva.com/15117/getdatasheetpartid-110528-15117488.pdf, ComponentLink1URL=https://datasheet.ciiva.com/15117/getdatasheetpartid-110528-15117488.pdf, ComponentLink2Description=https://datasheet.ciiva.com/11774/0900766b804a6539-11774578.pdf, ComponentLink2URL=https://datasheet.ciiva.com/11774/0900766b804a6539-11774578.pdf, ComponentLink3Description=https://datasheet.ciiva.com/19466/1557071-19466435.pdf, ComponentLink3URL=https://datasheet.ciiva.com/19466/1557071-19466435.pdf, ComponentLink4Description=https://datasheet.ciiva.com/14172/swseriehsmx-c150toc190-e-14172159.pdf, ComponentLink4URL=https://datasheet.ciiva.com/14172/swseriehsmx-c150toc190-e-14172159.pdf, ComponentLink5Description=https://datasheet.ciiva.com/29280/180507-da-01-en-chip-led-hsmy-c150-gelb-29280997.pdf, ComponentLink5URL=https://datasheet.ciiva.com/29280/180507-da-01-en-chip-led-hsmy-c150-gelb-29280997.pdf, ComponentLink6Description=https://datasheet.ciiva.com/11773/0900766b804a6539-11773956.pdf, ComponentLink6URL=https://datasheet.ciiva.com/11773/0900766b804a6539-11773956.pdf, ComponentLink7Description=https://datasheet.ciiva.com/15117/getdatasheetpartid-142358-15117749.pdf, ComponentLink7URL=https://datasheet.ciiva.com/15117/getdatasheetpartid-142358-15117749.pdf, ComponentLink8Description=https://datasheet.ciiva.com/46426/313031-46426533.pdf, ComponentLink8URL=https://datasheet.ciiva.com/46426/313031-46426533.pdf, ComponentLink9Description=https://datasheet.ciiva.com/14172/swseriehsmx-c150toc190-e-14172156.pdf, ComponentLink9URL=https://datasheet.ciiva.com/14172/swseriehsmx-c150toc190-e-14172156.pdf, ComponentLink10Description=https://datasheet.ciiva.com/29281/180509-da-01-en-chip-led-hsmh-c150-rot-29281009.pdf, ComponentLink10URL=https://datasheet.ciiva.com/29281/180509-da-01-en-chip-led-hsmh-c150-rot-29281009.pdf, Contact Plating=Gold, Depth=1.6mm, Dominant Wavelength=586nm, Height=1.1mm, Illumination Colour=Yellow, LatestRevisionDate=17-Jul-2002, LatestRevisionNote="Re-released for DXP Platform.", Lead Free="Lead Free", Length=3.2mm, Lens Style=Diffused,Colorless,Rectangular, Lens Transparency=Diffused, Luminous Intensity=8mcd, Mount="Surface Mount", Number of Elements=1, Number of LEDs=1, Number of Pins=2, PackageDescription="SM LED; 2 Flat Leads", PackageReference=3.2X1.6X1.1, PackageVersion=Feb-2002, Packaging="Tape and Reel", Power Dissipation=65mW, Power Rating=65mW, Published=8-Jun-2000, Publisher="Altium Limited", Radiation Hardening=No, REACH SVHC="No SVHC", Stock 1=0, Stock 2=0, Supplier 1=Digi-Key, Supplier 2=Digi-Key, Supplier 3=Digi-Key, Supplier 4=Digi-Key, Test Current=20mA, Viewing Angle=170°, Voltage Rating (DC)=2.1V, Wavelength=586nm, Width=1.6mm
D2: library part LED2, "Typical RED, GREEN, YELLOW, AMBER GaAs LED", Case/Package=1206, Case Code (Metric)=3216, Colour=Green,Yellow, Forward Current=20mA, Forward Voltage=2.2V, Lens Colour=White,Clear, Manufacturer="Broadcom Avago", Manufacturer Part Number=HSMG-C150, Max Operating Temperature=85°C, Max Power Dissipation=65mW, Min Operating Temperature=-30°C, Package Quantity=1, Reverse Voltage=5V, Supplier Part Number=732-4993-1-ND, Case Code (Imperial)=1206, ComponentLink1Description=https://datasheet.ciiva.com/11774/0900766b804a6539-11774272.pdf, ComponentLink1URL=https://datasheet.ciiva.com/11774/0900766b804a6539-11774272.pdf, ComponentLink2Description=https://datasheet.ciiva.com/14172/swseriehsmx-c150toc190-e-14172162.pdf, ComponentLink2URL=https://datasheet.ciiva.com/14172/swseriehsmx-c150toc190-e-14172162.pdf, ComponentLink3Description=https://datasheet.ciiva.com/46426/313031-46426517.pdf, ComponentLink3URL=https://datasheet.ciiva.com/46426/313031-46426517.pdf, ComponentLink4Description=https://datasheet.ciiva.com/15117/getdatasheetpartid-110366-15117482.pdf, ComponentLink4URL=https://datasheet.ciiva.com/15117/getdatasheetpartid-110366-15117482.pdf, ComponentLink5Description=https://datasheet.ciiva.com/19466/1556369-19466015.pdf, ComponentLink5URL=https://datasheet.ciiva.com/19466/1556369-19466015.pdf, ComponentLink6Description=https://datasheet.ciiva.com/29280/180668-da-01-en-chip-led-hsmg-c150-gelb-gruen-29280632.pdf, ComponentLink6URL=https://datasheet.ciiva.com/29280/180668-da-01-en-chip-led-hsmg-c150-gelb-gruen-29280632.pdf, Contact Plating=Gold, Depth=1.6mm, Dominant Wavelength=572nm, Height=1.1mm, Illumination Colour=Green, LatestRevisionDate=17-Jul-2002, LatestRevisionNote="Re-released for DXP Platform.", Length=3.2mm, Lens Style=Diffused,Colorless,Rectangular, Lens Transparency=Diffused, Luminous Intensity=15mcd, Mount="Surface Mount", Number of Elements=1, Number of LEDs=1, Number of Pins=2, PackageDescription="SM LED; 2 Flat Leads", PackageReference=3.2X1.6X1.1, PackageVersion=Feb-2002, Packaging="Tape and Reel", Power Dissipation=65mW, Power Rating=65mW, Published=8-Jun-2000, Publisher="Altium Limited", Radiation Hardening=No, REACH SVHC="No SVHC", Supplier 1=Digi-Key, Supplier 2=Digi-Key, Test Current=20mA, Viewing Angle=170°, Wavelength=572nm, Width=1.6mm
D3 D5 D6 D7: library part LED2, "Typical RED, GREEN, YELLOW, AMBER GaAs LED", Case/Package=1206, Case Code (Metric)=3216, Forward Current=20mA, Forward Voltage=2.1V, Lens Colour=White,Clear, Manufacturer="Broadcom Avago", Manufacturer Part Number=HSMY-C150, Max Operating Temperature=85°C, Max Power Dissipation=65mW, Min Operating Temperature=-40°C, Package Quantity=1, Reverse Voltage=5V, Supplier Part Number=732-4994-1-ND, Case Code (Imperial)=1206, Colour=Yellow, ComponentLink1Description=https://datasheet.ciiva.com/15117/getdatasheetpartid-110528-15117488.pdf, ComponentLink1URL=https://datasheet.ciiva.com/15117/getdatasheetpartid-110528-15117488.pdf, ComponentLink2Description=https://datasheet.ciiva.com/11774/0900766b804a6539-11774578.pdf, ComponentLink2URL=https://datasheet.ciiva.com/11774/0900766b804a6539-11774578.pdf, ComponentLink3Description=https://datasheet.ciiva.com/19466/1557071-19466435.pdf, ComponentLink3URL=https://datasheet.ciiva.com/19466/1557071-19466435.pdf, ComponentLink4Description=https://datasheet.ciiva.com/14172/swseriehsmx-c150toc190-e-14172159.pdf, ComponentLink4URL=https://datasheet.ciiva.com/14172/swseriehsmx-c150toc190-e-14172159.pdf, ComponentLink5Description=https://datasheet.ciiva.com/29280/180507-da-01-en-chip-led-hsmy-c150-gelb-29280997.pdf, ComponentLink5URL=https://datasheet.ciiva.com/29280/180507-da-01-en-chip-led-hsmy-c150-gelb-29280997.pdf, Contact Plating=Gold, Depth=1.6mm, Dominant Wavelength=586nm, Height=1.1mm, Illumination Colour=Yellow, LatestRevisionDate=17-Jul-2002, LatestRevisionNote="Re-released for DXP Platform.", Lead Free="Lead Free", Length=3.2mm, Lens Style=Diffused,Colorless,Rectangular, Lens Transparency=Diffused, Luminous Intensity=8mcd, Mount="Surface Mount", Number of Elements=1, Number of LEDs=1, Number of Pins=2, PackageDescription="SM LED; 2 Flat Leads", PackageReference=3.2X1.6X1.1, PackageVersion=Feb-2002, Packaging="Tape and Reel", Power Dissipation=65mW, Power Rating=65mW, Published=8-Jun-2000, Publisher="Altium Limited", Radiation Hardening=No, REACH SVHC="No SVHC", Stock 1=0, Supplier 1=Digi-Key, Supplier 2=Digi-Key, Test Current=20mA, Viewing Angle=170°, Voltage Rating (DC)=2.1V, Wavelength=586nm, Width=1.6mm
D4 D21: "Default Diode", Supplier Part Number=SS1P3L-M3/84AGICT-ND, Code_JEDEC=DO-214-AB, LatestRevisionDate=17-Jul-2002, LatestRevisionNote="Re-released for DXP Platform.", PackageDescription="DO-214-AB/SMC; 2 C-Bend Leads; Body 7.9 x 5.9 mm, inc. leads (LxW)", PackageReference=SMC, PackageVersion=Sep-1996, Published=8-Jun-2000, Publisher="Altium Limited", Supplier 1=Digi-Key, Supplier 2=Digi-Key
D8 D9 D12 D13 D14: "Default Diode", Supplier Part Number 1=BAT42W-FDICT-ND, Code_JEDEC=DO-214-AB, LatestRevisionDate=17-Jul-2002, LatestRevisionNote="Re-released for DXP Platform.", PackageDescription="DO-214-AB/SMC; 2 C-Bend Leads; Body 7.9 x 5.9 mm, inc. leads (LxW)", PackageReference=SMC, PackageVersion=Sep-1996, Published=8-Jun-2000, Publisher="Altium Limited", Supplier 1=Digi-Key
D10 D11 D15 D16 D17 D22 D23: library part LED2_2, "Typical RED, GREEN, YELLOW, AMBER GaAs LED", Case/Package=1206, Case Code (Metric)=3216, Colour=Yellow, Forward Current=20mA, Forward Voltage=2.1V, Lens Colour=White,Clear, Manufacturer="Broadcom Avago", Manufacturer Part Number=HSMY-C150, Max Operating Temperature=85°C, Max Power Dissipation=65mW, Min Operating Temperature=-40°C, Package Quantity=1, Reverse Voltage=5V, Supplier Part Number=732-4992-1-ND, Case Code (Imperial)=1206, ComponentLink1Description=https://datasheet.ciiva.com/15117/getdatasheetpartid-110528-15117488.pdf, ComponentLink1URL=https://datasheet.ciiva.com/15117/getdatasheetpartid-110528-15117488.pdf, ComponentLink2Description=https://datasheet.ciiva.com/11774/0900766b804a6539-11774578.pdf, ComponentLink2URL=https://datasheet.ciiva.com/11774/0900766b804a6539-11774578.pdf, ComponentLink3Description=https://datasheet.ciiva.com/19466/1557071-19466435.pdf, ComponentLink3URL=https://datasheet.ciiva.com/19466/1557071-19466435.pdf, ComponentLink4Description=https://datasheet.ciiva.com/14172/swseriehsmx-c150toc190-e-14172159.pdf, ComponentLink4URL=https://datasheet.ciiva.com/14172/swseriehsmx-c150toc190-e-14172159.pdf, ComponentLink5Description=https://datasheet.ciiva.com/29280/180507-da-01-en-chip-led-hsmy-c150-gelb-29280997.pdf, ComponentLink5URL=https://datasheet.ciiva.com/29280/180507-da-01-en-chip-led-hsmy-c150-gelb-29280997.pdf, ComponentLink6Description=https://datasheet.ciiva.com/11773/0900766b804a6539-11773956.pdf, ComponentLink6URL=https://datasheet.ciiva.com/11773/0900766b804a6539-11773956.pdf, ComponentLink7Description=https://datasheet.ciiva.com/15117/getdatasheetpartid-142358-15117749.pdf, ComponentLink7URL=https://datasheet.ciiva.com/15117/getdatasheetpartid-142358-15117749.pdf, ComponentLink8Description=https://datasheet.ciiva.com/46426/313031-46426533.pdf, ComponentLink8URL=https://datasheet.ciiva.com/46426/313031-46426533.pdf, ComponentLink9Description=https://datasheet.ciiva.com/14172/swseriehsmx-c150toc190-e-14172156.pdf, ComponentLink9URL=https://datasheet.ciiva.com/14172/swseriehsmx-c150toc190-e-14172156.pdf, ComponentLink10Description=https://datasheet.ciiva.com/29281/180509-da-01-en-chip-led-hsmh-c150-rot-29281009.pdf, ComponentLink10URL=https://datasheet.ciiva.com/29281/180509-da-01-en-chip-led-hsmh-c150-rot-29281009.pdf, Contact Plating=Gold, Depth=1.6mm, Dominant Wavelength=586nm, Height=1.1mm, Illumination Colour=Yellow, LatestRevisionDate=17-Jul-2002, LatestRevisionNote="Re-released for DXP Platform.", Lead Free="Lead Free", Length=3.2mm, Lens Style=Diffused,Colorless,Rectangular, Lens Transparency=Diffused, Luminous Intensity=8mcd, Mount="Surface Mount", Number of Elements=1, Number of LEDs=1, Number of Pins=2, PackageDescription="SM LED; 2 Flat Leads", PackageReference=3.2X1.6X1.1, PackageVersion=Feb-2002, Packaging="Tape and Reel", Power Dissipation=65mW, Power Rating=65mW, Published=8-Jun-2000, Publisher="Altium Limited", Radiation Hardening=No, REACH SVHC="No SVHC", Stock 1=0, Stock 2=0, Supplier 1=Digi-Key, Supplier 2=Digi-Key, Supplier 3=Digi-Key, Supplier 4=Digi-Key, Test Current=20mA, Viewing Angle=170°, Voltage Rating (DC)=2.1V, Wavelength=586nm, Width=1.6mm
D19: "Default Diode", Supplier Part Number 1=S10D-TPMSCT-ND, Code_JEDEC=DO-214-AB, LatestRevisionDate=17-Jul-2002, LatestRevisionNote="Re-released for DXP Platform.", PackageDescription="DO-214-AB/SMC; 2 C-Bend Leads; Body 7.9 x 5.9 mm, inc. leads (LxW)", PackageReference=SMC, PackageVersion=Sep-1996, Published=8-Jun-2000, Publisher="Altium Limited", Supplier 1=Digi-Key
D20: "Switching diode", Supplier Part Number 1=SS1P3L-M3/84AGICT-ND, Code_JEDEC=DO-214-AB, LatestRevisionDate=17-Jul-2002, LatestRevisionNote="Re-released for DXP Platform.", PackageDescription="DO-214-AB/SMC; 2 C-Bend Leads; Body 7.9 x 5.9 mm, inc. leads (LxW)", PackageReference=SMC, PackageVersion=Sep-1996, Published=8-Jun-2000, Publisher="Altium Limited", Supplier 1=Digi-Key
F1: "Fuse", Case/Package=1812, Case Code (Metric)=4532, Current Rating=100A, Hold Current=500mA, Manufacturer=Bourns, Manufacturer Part Number=MF-MSMF050-2, Max Operating Temperature=85°C, Min Operating Temperature=-40°C, Operating Supply Voltage=15V, Package Quantity=2000, Power Dissipation=800mW, Resistance=150mR, Supplier Part Number=?MF-MSMF050-2CT-ND, Trip Current=1A, Approvals=UL,CSA,TUV, Case Code (Imperial)=1812, ComponentLink1Description=https://datasheet.ciiva.com/326/mfmsmf-326354.pdf, ComponentLink1URL=https://datasheet.ciiva.com/326/mfmsmf-326354.pdf, ComponentLink2Description=https://datasheet.ciiva.com/1228/1786007-1228155.pdf, ComponentLink2URL=https://datasheet.ciiva.com/1228/1786007-1228155.pdf, ComponentLink3Description=https://datasheet.ciiva.com/16205/mfmsmf-16205994.pdf, ComponentLink3URL=https://datasheet.ciiva.com/16205/mfmsmf-16205994.pdf, ComponentLink4Description=https://datasheet.ciiva.com/34302/1164200-34302041.pdf, ComponentLink4URL=https://datasheet.ciiva.com/34302/1164200-34302041.pdf, ComponentLink5Description=https://datasheet.ciiva.com/14537/70153434-14537737.pdf, ComponentLink5URL=https://datasheet.ciiva.com/14537/70153434-14537737.pdf, ComponentLink6Description=https://datasheet.ciiva.com/46395/1695373-46395287.pdf, ComponentLink6URL=https://datasheet.ciiva.com/46395/1695373-46395287.pdf, ComponentLink7Description=https://datasheet.ciiva.com/22749/1695373-22749079.pdf, ComponentLink7URL=https://datasheet.ciiva.com/22749/1695373-22749079.pdf, ComponentLink8Description=https://datasheet.ciiva.com/32426/mf-msmf-series-eng-tds-32426126.pdf, ComponentLink8URL=https://datasheet.ciiva.com/32426/mf-msmf-series-eng-tds-32426126.pdf, ComponentLink9Description=https://datasheet.ciiva.com/4501/mfmsmf-72300-4501655.pdf, ComponentLink9URL=https://datasheet.ciiva.com/4501/mfmsmf-72300-4501655.pdf, ComponentLink10Description=https://datasheet.ciiva.com/3019/mfmsmf-3019622.pdf, ComponentLink10URL=https://datasheet.ciiva.com/3019/mfmsmf-3019622.pdf, ComponentLink11Description=https://datasheet.ciiva.com/3019/mfmsmf-3019621.pdf, ComponentLink11URL=https://datasheet.ciiva.com/3019/mfmsmf-3019621.pdf, ComponentLink12Description=https://datasheet.ciiva.com/326/mfmsmf-326356.pdf, ComponentLink12URL=https://datasheet.ciiva.com/326/mfmsmf-326356.pdf, ComponentLink13Description=https://datasheet.ciiva.com/1274/1786007-1274499.pdf, ComponentLink13URL=https://datasheet.ciiva.com/1274/1786007-1274499.pdf, ComponentLink14Description=https://datasheet.ciiva.com/326/mfmsmf-326355.pdf, ComponentLink14URL=https://datasheet.ciiva.com/326/mfmsmf-326355.pdf, ComponentLink15Description=https://datasheet.ciiva.com/1274/1786007-1274498.pdf, ComponentLink15URL=https://datasheet.ciiva.com/1274/1786007-1274498.pdf, ComponentLink16Description=https://datasheet.ciiva.com/15226/getdatasheetpartid-117168-15226886.pdf, ComponentLink16URL=https://datasheet.ciiva.com/15226/getdatasheetpartid-117168-15226886.pdf, ComponentLink17Description=https://datasheet.ciiva.com/25894/mfmsmf-25894175.pdf, ComponentLink17URL=https://datasheet.ciiva.com/25894/mfmsmf-25894175.pdf, Contact Plating=Gold, Height=0.85mm, LatestRevisionDate=17-Jul-2002, LatestRevisionNote="Re-released for DXP Platform.", Lead Free="Lead Free", Length=4.73mm, Max Current Rating=100A, Mount="Surface Mount,PCB", Number of Terminals=2, PackageDescription="Thru-Hole; 2 Leads", PackageReference=PIN-W2/E2.8, Packaging="Tape and Reel", part number=MF-MSMF050-2, Pricing 1="2000=0.2898, 4000=0.28463, 6000=0.27945, 10000=0.2691 (USD)", Published=8-Jun-2000, Publisher="Altium Limited", Radiation Hardening=No, REACH SVHC="No SVHC", Stock 1=126000, Supplier 1=Digi-Key, Terminal Material=Gold, Termination=SMD/SMT, Time to Trip=0.15s, Voltage Rating=15V, Voltage Rating (DC)=15V, Width=3.41mm
J1: library part 1050170001, "CONN SM TH USB MICRO MODIFIED FOR DRILL", part number=WM1399CT-ND, Supplier Part Number=609-4618-1-ND, Details="Modified from reference footprint for standard drill hits (rather than slots)", Supplier 1=Digi-Key
K1: "Miniature Power PCB Relay PB, 1 Form A Contact, 12 V, 10 A, 360 mW, Standard Version, -40 to 85 degC, 5-Pin 15 x 15 x 20 mm THD, RoHS, Tube", Coil Resistance="400 Ohms", Coil Voltage="24 V", Contact Current Rating="10 A", Supplier Part Number 1=15AC8464, ComponentLink1Description="Manufacturer URL", ComponentLink1URL=http://www.te.com, ComponentLink2Description=Datasheet, ComponentLink2URL=http://www.te.com/commerce/DocumentDelivery/DDEController?Action=showdoc&DocId=Data+Sheet%7FPB%7F0411%7Fpdf%7FEnglish%7FENG_DS_PB_0411.pdf%7F2-1415030-1, Contact Form="1 Form A (SPST-NO)", Contact Material="Silver Nickel", DatasheetVersion="Rev. 0411", Mounting Style="Through Hole", Mounting Technology="Through Hole", PackageReference=THD, Supplier 1=Newark, Supplier 2=Farnell, Supplier 3=Digi-Key, Supplier Part Number 2=2748039, Supplier Part Number 3=PB768-ND
P1: library part "Header 3X2A", "Header, 3-Pin, Dual row", LatestRevisionDate=17-Jul-2002, LatestRevisionNote="Re-released for DXP Platform.", Publisher="Altium Limited"
P2 P3: library part "Header 2", "Header, 2-Pin", LatestRevisionDate=17-Jul-2002, LatestRevisionNote="Re-released for DXP Platform.", Publisher="Altium Limited"
P4 P6: library part "Header 10X2", "Header, 10-Pin, Dual row", LatestRevisionDate=17-Jul-2002, LatestRevisionNote="Re-released for DXP Platform.", Publisher="Altium Limited"
P5: library part 0431600104, "4pin blade header molex", Manufacturer_Name=Molex, RS Part Number=3639982P, Allied_Number=70372885, Allied Price/Stock=https://www.alliedelec.com/molex-incorporated-43160-3102/70372885/, Arrow Part Number=43160-3102, Arrow Price/Stock=http://uk.rs-online.com/web/p/products/3639982P, Datasheet Link=https://www.molex.com/pdm_docs/sd/431603102_sd.pdf, Geometry.Height=11mm, Manufacturer_Part_Number=43160-3102, RS Price/Stock=http://uk.rs-online.com/web/p/products/3639982P